# Altium PCB Copy of PCB_MainBoard.PcbDoc
Units mm, origin at the board's own origin, x right, y up, seen from the top; angles counter-clockwise.
Board outline 88.01 x 83.57 mm, 2 copper layers (Top Layer, Bottom Layer); 23 components, 28 nets, 100 pads, 8 vias.
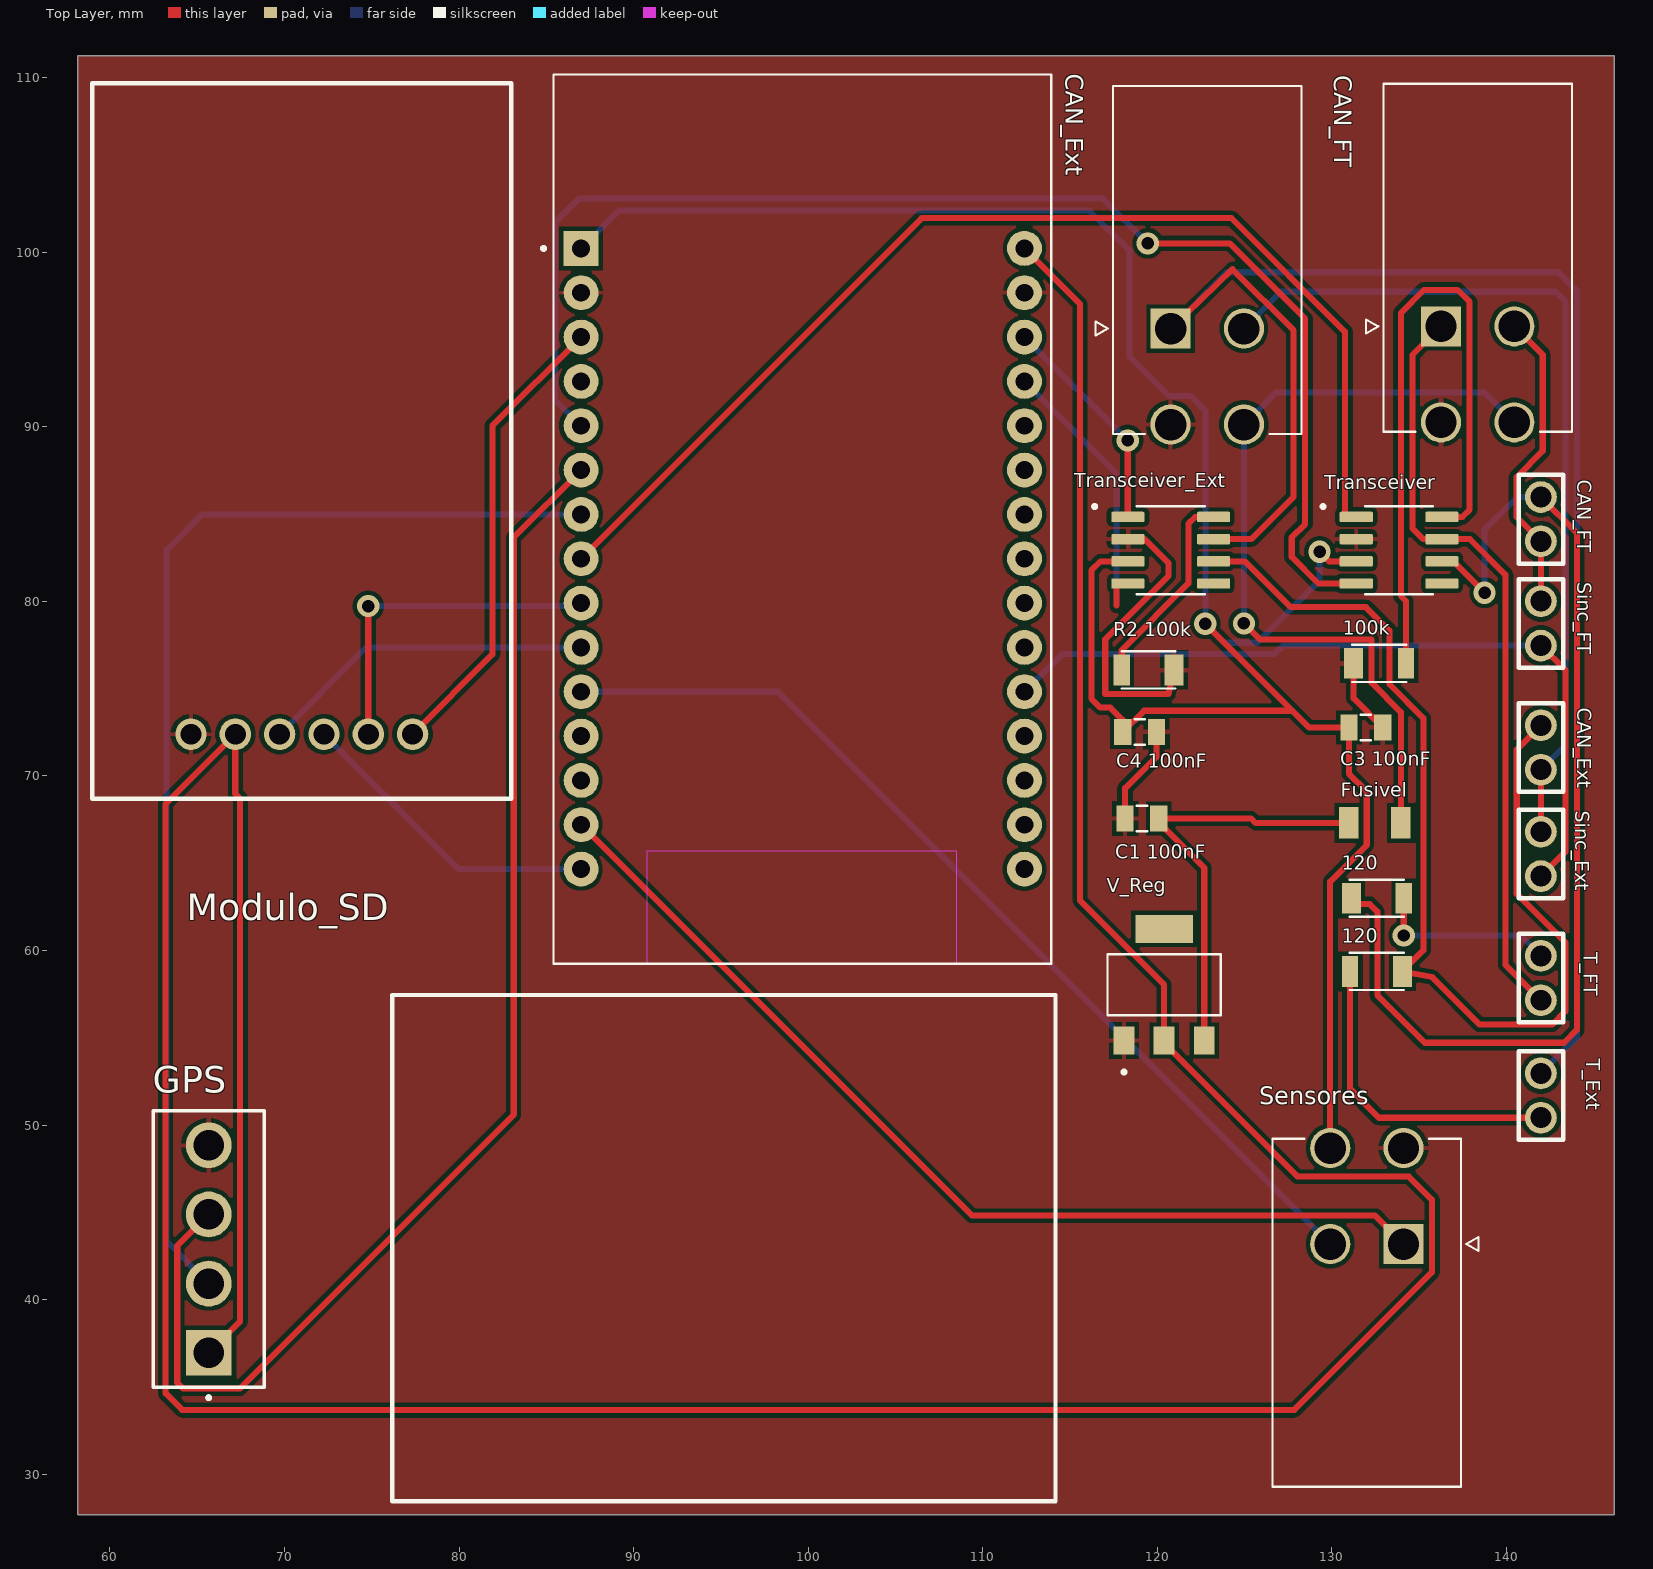
[diagram p0: Top Layer view]
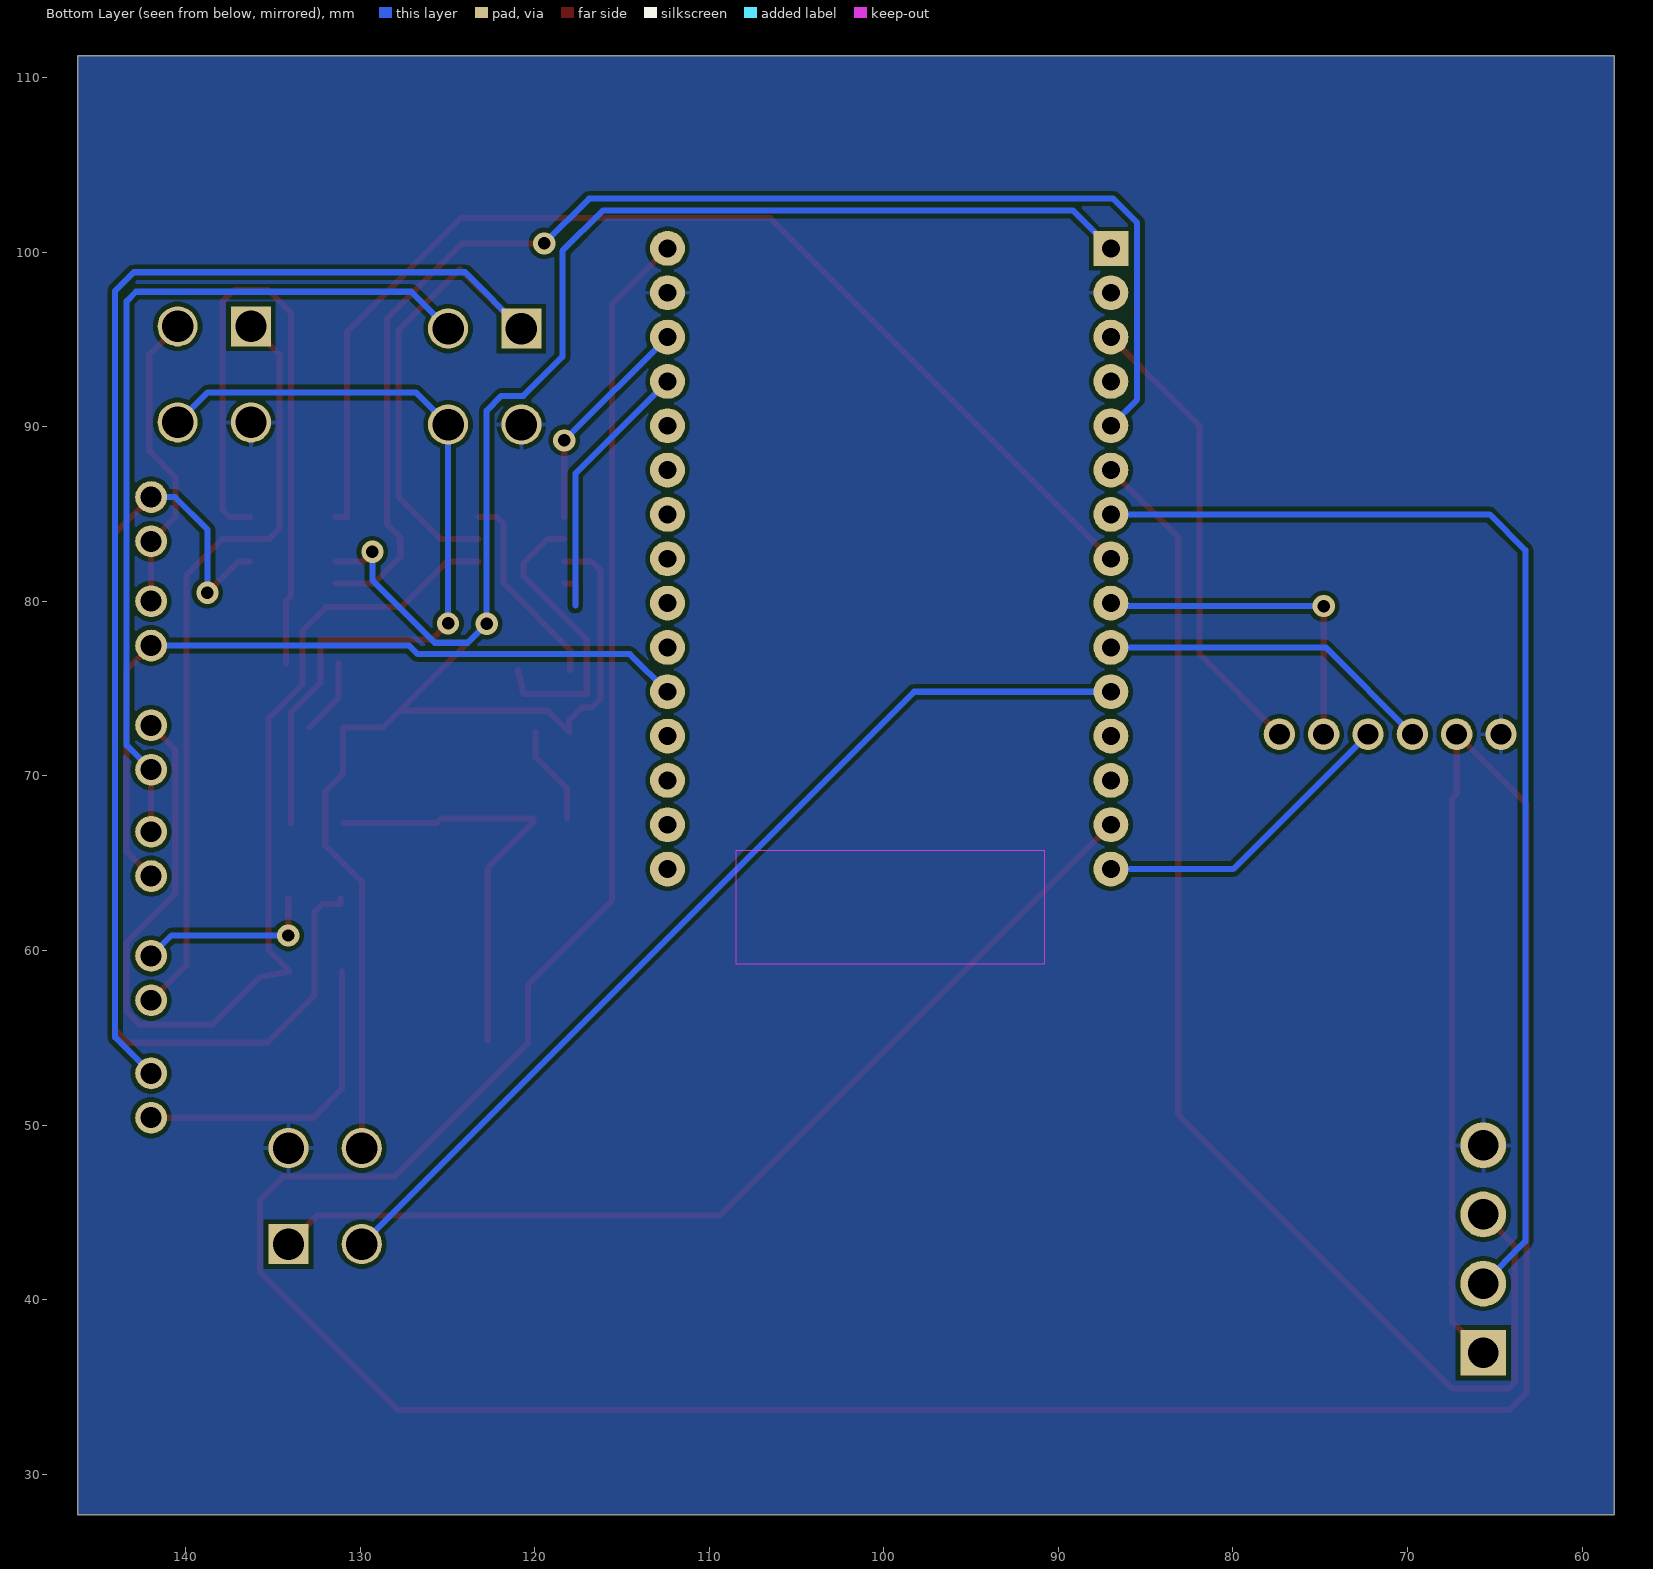
[diagram p1: Bottom Layer view, seen from below]

## Layer stack, top to bottom
Top Solder: solder mask 0.0102, Solder Resist, Dk 3.5
Top Layer: signal copper 0.0356
Dielectric 1: dielectric 0.32, FR-4, Dk 4.8
Bottom Layer: signal copper 0.0356
Bottom Solder: solder mask 0.0102, Solder Resist, Dk 3.5

## Board outline
58.166,27.686 146.177,27.686 146.177,111.252 58.166,111.252

## Design rules (kind name [scope] priority, off if disabled: settings)
Clearance [All] p1: gap=0.254 ignorepadtopadclearanceinfootprint=FALSE except(0: Arc-Hole Track-Hole SMDPad-Hole THPad-Hole Via-Hole Fill-Hole Poly-Hole Region-Hole Text-Hole; 0.3: Arc-Arc Arc-Track Arc-SMDPad Arc-THPad Arc-Via Track-Track Track-SMDPad Track-THPad Track-Via SMDPad-THPad SMDPad-Via THPad-THPad THPad-Via Via-Via)
PolygonConnect [All] p1: connectstyle=Relief reliefconductorwidth=0.254 reliefentries=4 polygonreliefangle="90 Angle" airgapwidth=0.254
RoutingVias [All] p1: holewidth=0.711 width=1.27 viastyle="Through Hole" minholewidth=0.711 minwidth=1.27 maxholewidth=0.711 maxwidth=1.27
SolderMaskExpansion [All] p1: expansion=0.102 istentingtop=FALSE
Width [All] p1: maxlimit=0.4 minlimit=0.254 preferedwidth=0.35 minimp=50.000000 maximp=50.000000 favimp=50.000000
30 further rules are at their usual default settings.

## Classes and differential pairs
component class Esquematico_MainBoard: 100k 120 "C1 100nF" "C3 100nF" "C4 100nF" CAN_Ext CAN_FT Fusivel GPS Modulo_SD "R2 100k" Sensores

## Components (designator, comment, footprint, x,y, rotation, side; value= is the part's Value field where it differs from the comment)
100k "CRG1206F620K" RESC3115X65N 132.715,76.454 r0 top
120 "CRG1206F620K" RESC3115X65N 132.588,58.801 r180 top (schematic designator "R2 120")
120 "CRG1206F620K" RESC3115X65N 132.588,62.992 r0 top
"C1 100nF" "C2012X5R1E225M085AC" *CAPC2012X100N 119.126,67.564 r180 top
"C3 100nF" "C2012X5R1E225M085AC" *CAPC2012X100N 131.953,72.771 r0 top
"C4 100nF" "C2012X5R1E225M085AC" *CAPC2012X100N 118.999,72.517 r0 top
CAN_Ext "2Pin" 2Pin 141.986,70.358 r90 top (schematic designator Seletor_2)
CAN_Ext "874270402" MOLEX_874270402 120.768,95.631 r180 top
CAN_FT "2Pin" 2Pin 141.986,83.439 r90 top (schematic designator Seletor_4)
CAN_FT "874270402" MOLEX_874270402 136.262,95.758 r180 top
Fusivel "F1206B3R00FWTR" *FUSM3216X140N 132.461,67.31 r180 top
GPS "FWJ-04-01-T-S" SAMTEC_FWJ-04-01-T-S 65.659,42.897 r90 top
Modulo_SD "Component_1" MICROSD_MODULE 58.983,68.69 r0 top
"R2 100k" "CRG1206F620K" RESC3115X65N 119.507,76.073 r180 top
Sensores "874270402" MOLEX_874270402 134.112,43.18 r0 top
Sinc_Ext "2Pin" 2Pin 141.986,64.262 r90 top (schematic designator Seletor_1)
Sinc_FT "2Pin" 2Pin 141.986,77.47 r90 top (schematic designator Seletor_3)
T_Ext "2Pin" 2Pin 141.986,50.419 r90 top (schematic designator Terminador_CAN_E)
T_FT "2Pin" 2Pin 141.986,59.69 r270 top (schematic designator 2Pin_CAN)
Transceiver "MCP2551-E/SN" SOIC127P600X175-8N 133.858,82.931 r0 top
Transceiver_Ext "MCP2551-E/SN" SOIC127P600X175-8N 120.777,82.931 r0 top (schematic designator Transceiver_CAN_Ext)
V_Reg "TS1117BCW50_RPG" VREG_TS1117BCW50_RPG 120.396,58.039 r90 top
? "ESP32-DEVKIT-V1" MODULE_ESP32_DEVKIT_V1 99.695,84.709 r0 top

## Footprints (in the part's own frame and the unit in brackets; to place one, negate y for a bottom-side part, rotate by r counter-clockwise, add the part's x,y. Pads: shape width x height; smd on the part's side, far side on the other; paste and mask are expansions set on the pad)
2Pin [mm]
  round 1.82 hole 1.2: 0(0,0) 1(2.54,0)
  silkscreen extent -1.27,-1.27 3.81,1.27, body extent -1.27,-1.19 3.79,1.27, height 8.54
*CAPC2012X100N [mm]
  rect 0.99x1.47 smd: 1(-0.965,0) 2(0.965,0)
  silkscreen extent -0.3,-0.73 0.3,0.73, body extent -1.05,-0.67 1.05,0.67, height 0.95
*FUSM3216X140N [mil]
  rect 44x71 smd: 1(-59,0) 2(59,0)
MICROSD_MODULE [mm]
  round 1.8 hole 1.2: 0(5.66,3.7) 1(8.2,3.7) 2(10.74,3.7) 3(13.28,3.7) 4(15.82,3.7) 5(18.36,3.7)
  silkscreen extent 0,0 24,41, body extent 0,-4.3 24,41.65, height 6.25
MODULE_ESP32_DEVKIT_V1 [mm]
  rect 2x2 / inner round 2 / far side rect 2x2 hole 1.02: 1(-12.7,15.515)
  round 2 hole 1.02: 2(-12.7,12.975) 3(-12.7,10.435) 4(-12.7,7.895) 5(-12.7,5.355) 6(-12.7,2.815) 7(-12.7,0.275) 8(-12.7,-2.265) 9(-12.7,-4.805) 10(-12.7,-7.345) 11(-12.7,-9.885) 12(-12.7,-12.425) 13(-12.7,-14.965) 14(-12.7,-17.505) 15(-12.7,-20.045) 16(12.7,-20.045) 17(12.7,-17.505) 18(12.7,-14.965) 19(12.7,-12.425) 20(12.7,-9.885) 21(12.7,-7.345) 22(12.7,-4.805) 23(12.7,-2.265) 24(12.7,0.275) 25(12.7,2.815) 26(12.7,5.355) 27(12.7,7.895) 28(12.7,10.435) 29(12.7,12.975) 30(12.7,15.515)
  Keep-Out Layer region: 8.78,-25.475 -8.91,-25.475 -8.91,-18.985 8.78,-18.985
  silkscreen extent -14.95,-25.47 14.23,25.47
MOLEX_874270402 [mm]
  rect 2.3x2.3 hole 1.8 mask+0.076: 1(0,0)
  round 2.3 hole 1.8 mask+0.076: 2(-4.2,0) 3(0,5.5) 4(-4.2,5.5)
  silkscreen extent -7.5,-13.9 4.3,6.04, body extent -7.62,-13.78 3.18,6.16, height 11.4
RESC3115X65N [mm]
  rect 1.09x1.77 smd: 1(-1.465,0)
  rect 0.94x1.77 smd: 2(1.54,0)
  silkscreen extent -1.55,-1.07 1.55,1.07, body extent -1.6,-0.8 1.6,0.8, height 0.55
SAMTEC_FWJ-04-01-T-S [mm]
  rect 2.625x2.625 hole 1.75: 01(-5.94,0)
  round 2.625 hole 1.75: 02(-1.98,0) 03(1.98,0) 04(5.94,0)
  silkscreen extent -8.62,-3.18 7.92,3.18
SOIC127P600X175-8N [mm]
  rrect25% 1.9x0.6 smd: 1(-2.455,1.905) 2(-2.455,0.635) 3(-2.455,-0.635) 4(-2.455,-1.905) 5(2.455,-1.905) 6(2.455,-0.635) 7(2.455,0.635) 8(2.455,1.905)
  silkscreen extent -4.45,-2.53 1.95,2.6, body extent -3,-2.45 3,2.45, height 1.75
VREG_TS1117BCW50_RPG [mm]
  rect 1.6x1.2 smd: 1(-3.2,2.3) 2(-3.2,0) 3(-3.2,-2.3)
  rect 1.6x3.3 smd: 4(3.2,0)
  silkscreen extent -5.1,-3.25 1.75,3.25, body extent -3.5,-3.25 3.5,3.25, height 1.9

## Part data
100k 120 120 "R2 100k": "Res Thick Film 1206 620K Ohm 1% 0.25W_1/4W_ Â±100ppm/C Pad SMD T/R", Package="1206 TE Connectivity", Availability=Unavailable, MF="TE Connectivity", MP=CRG1206F620K, Price="0.00 USD", SnapEDA_Link=https://www.snapeda.com/parts/CRG1206F620K/TE%20Connectivity%20/%20DEUTSCH/view-part/?ref=snap
"C1 100nF" "C3 100nF" "C4 100nF": "Cap Ceramic 2.2uF 25V X5R 20% SMD 0805 85Â°C Punched Paper T/R", Package="0805 TDK", Availability=Unavailable, MF=TDK, MP=C2012X5R1E225M085AC, Price=None, SnapEDA_Link=https://www.snapeda.com/parts/C2012X5R1E225M085AC/TDK/view-part/?ref=snap
CAN_Ext CAN_FT Sensores: "Conn Wire to Board HDR 4 POS 4.2mm Solder RA Side Entry Thru-Hole Mini-Fit Jrâ„¢ Tray", Package=None, Availability="In Stock", Check_prices=https://www.snapeda.com/parts/874270402/Molex/view-part/?ref=eda, MF=Molex, MP=874270402, Price=None, Purchase-URL=https://pricing.snapeda.com/search/part/874270402/?ref=eda, SnapEDA_Link=https://www.snapeda.com/parts/874270402/Molex/view-part/?ref=snap
Fusivel: "F1206B Series Fast Acting 63 V 3 A 1206 Surface Mount Thin-Film Fuse T&R", Package="1206 AVX", Availability=Unavailable, MF=AVX, MP=F1206B3R00FWTR, Price=None, SnapEDA_Link=https://www.snapeda.com/parts/F1206B3R00FWTR/AVX%20/%20Kyocera/view-part/?ref=snap
GPS: "Connector Header Through Hole 4 position 0.156 (3.96mm)", Package=None, Availability=Bad, Check_prices=https://www.snapeda.com/parts/FWJ-04-01-T-S/Samtec/view-part/3573755/?ref=eda, MF=Samtec, MP=FWJ-04-01-T-S, Price=None, Purchase-URL=https://pricing.snapeda.com/search/part/FWJ-04-01-T-S/?ref=eda, SnapEDA_Link=https://www.snapeda.com/parts/FWJ-04-01-T-S/Samtec/view-part/3573755/?ref=snap
Transceiver Transceiver_Ext: "1/1 Transceiver Half CANbus 8-SOIC", Package="SOIC-8 Microchip", Availability="In Stock", Check_prices=https://www.snapeda.com/parts/MCP2551-E/SN/Microchip/view-part/?ref=eda, MF=Microchip, MP=MCP2551-E/SN, Price=None, Purchase-URL=https://pricing.snapeda.com/search/part/MCP2551-E/SN/?ref=eda, SnapEDA_Link=https://www.snapeda.com/parts/MCP2551-E/SN/Microchip/view-part/?ref=snap
V_Reg: "1A 5V LOW DROPOUT VOLTAGE REGULATOR", Package="SOT-223 Taiwan Semiconductor", Availability="In Stock", Check_prices=https://www.snapeda.com/parts/TS1117BCW50%20RPG/Taiwan+Semiconductor/view-part/?ref=eda, MF="Taiwan Semiconductor", MP="TS1117BCW50 RPG", Price=None, Purchase-URL="https://pricing.snapeda.com/search/part/TS1117BCW50 RPG/?ref=eda", SnapEDA_Link=https://www.snapeda.com/parts/TS1117BCW50%20RPG/Taiwan+Semiconductor/view-part/?ref=snap
?: "Dual core, Wi-Fi: 2.4 GHz up to 150 Mbits/s,BLE (Bluetooth Low Energy) and legacy Bluetooth, 32 bits, Up to 240 MHz", Package=None, Availability="Not in stock", Check_prices=https://www.snapeda.com/parts/ESP32-DEVKIT-V1/Do+it/view-part/?ref=eda, MF="Do it", MP=ESP32-DEVKIT-V1, Price=None, SnapEDA_Link=https://www.snapeda.com/parts/ESP32-DEVKIT-V1/Do+it/view-part/?ref=snap

## Via types
v1: diameter 1.27, hole 0.711, Top Layer to Bottom Layer, 8 vias

## Nets (pads, with @x,y where several pads share a name; then routed paths per layer and width w, separated by ;. In a path a pad name is that pad's centre, name@x,y a point inside that pad or via, vN(x,y) a via of type N, cw(c..) or ccw(c..) an arc to the next point about the centre after c; other vN are vias at no path point)
GND: 100k.1 "C1 100nF.2" "C3 100nF.2" "C4 100nF.2" "R2 100k.1" ?.2 ?.29 CAN_Ext.3 CAN_FT.3 GPS.04 Modulo_SD.0 Sensores.3 Transceiver.2 Transceiver_Ext.2 V_Reg.1 | length 27
  Top Layer w0.35: 118.161,67.564 118.161,69.292 119.964,71.095 119.964,72.517 ; Transceiver_Ext.2 119.278,83.566 120.65,82.194 120.65,81.458 117.022,77.83 117.022,74.701 120.65,74.701 120.972,76.073 ; 100k.1 131.25,74.439 132.918,72.771
Net2Pin_CAN_0: 120.2@134.128,62.992 T_FT.0 | length 10.5
  Top Layer w0.35: v1(134.128,60.858) 120.2@134.128,62.992
  Bottom Layer w0.35: v1(134.128,60.858) 140.818,60.858 T_FT.0
Net2Pin_CAN_1: CAN_FT.1@136.262,95.758 T_FT.1 Transceiver.7 | length 43.9
  Top Layer w0.35: CAN_FT.1@136.262,95.758 134.62,94.116 134.62,84.201 135.255,83.566 Transceiver.7 137.922,83.566 139.951,81.537 139.951,59.185 T_FT.1
Net100k_2: 100k.2 Transceiver.8 | length 38.6
  Top Layer w0.35: 100k.2 134.255,80.019 133.96,80.315 133.96,96.52 135.28,97.841 137.211,97.841 137.897,97.155 137.897,85.255 137.477,84.836 Transceiver.8
Net120_1: 120.1@131.123,62.992 CAN_FT.1@141.986,85.979 Transceiver.6 | length 61.9
  Top Layer w0.35: 120.1@131.123,62.992 131.123,62.662 132.182,62.662 132.613,62.23 132.613,57.429 135.331,54.712 143.307,54.712 144.043,55.448 144.043,83.922 CAN_FT.1@141.986,85.979 ; Transceiver.6 136.957,82.296 v1(138.76,80.493)
  Bottom Layer w0.35: v1(138.76,80.493) 138.76,84.125 140.614,85.979 CAN_FT.1@141.986,85.979
Net_1: "C3 100nF.1" "C4 100nF.1" ?.1 Sensores.4 Transceiver.3 Transceiver_Ext.3 | length 128.5
  Top Layer w0.35: Transceiver_Ext.3 116.753,82.296 116.233,81.776 116.233,74.434 116.749,73.918 117.319,73.918 118.034,73.203 118.034,72.517 119.253,73.736 127.737,73.736 ; v1(122.758,78.715) 127.737,73.736 ; v1(129.305,82.848) 129.857,82.296 Transceiver.3 ; Sensores.4 129.912,63.948 132.004,66.04 132.004,69.114 130.988,70.129 130.988,72.771 130.023,72.771 128.702,72.771 127.737,73.736
  Bottom Layer w0.35: ?.1 89.158,102.387 116.103,102.387 118.415,100.076 118.415,94.005 120.65,91.77 121.92,91.77 122.758,90.932 v1(122.758,78.715) 123.843,77.63 125.73,77.63 129.305,81.205 v1(129.305,82.848)
Net_3: ?.3 Modulo_SD.5 | length 26.8
  Top Layer w0.35: Modulo_SD.5 81.915,76.962 81.915,90.064 ?.3
Net_5: ?.5 Transceiver.4 | length 76.9
  Top Layer w0.35: v1(119.456,100.508) 124.155,100.508 128.473,96.19 128.473,84.43 127.711,83.668 127.711,82.55 129.235,81.026 Transceiver.4
  Bottom Layer w0.35: ?.5 85.496,91.563 85.496,101.702 86.868,103.073 116.891,103.073 v1(119.456,100.508)
Net_6: ?.6 GPS.03 | length 74.8
  Top Layer w0.35: GPS.03 63.856,43.074 63.856,35.242 64.198,34.9 67.437,34.9 83.134,50.597 83.134,83.663 ?.6
Net_7: ?.7 GPS.02 | length 67.6
  Bottom Layer w0.35: GPS.02 63.246,43.33 63.246,82.931 65.299,84.984 ?.7
Net_8: ?.8 Transceiver.1 | length 65.8
  Top Layer w0.35: ?.8 106.507,101.956 124.257,101.956 130.759,95.453 130.759,84.836 Transceiver.1
Net_9: ?.9 Modulo_SD.4 | length 19.6
  Top Layer w0.35: Modulo_SD.4 v1(74.803,79.731)
  Bottom Layer w0.35: v1(74.803,79.731) 86.822,79.731 ?.9
Net_10: ?.10 Modulo_SD.2 | length 19.3
  Bottom Layer w0.35: Modulo_SD.2 74.697,77.364 ?.10
Net_11: ?.11 Sensores.2 | length 56
  Bottom Layer w0.35: ?.11 98.268,74.824 Sensores.2
Net_14: ?.14 Sensores.1 | length 57.1
  Top Layer w0.35: ?.14 109.393,44.806 132.486,44.806 Sensores.1
Net_15: ?.15 Modulo_SD.3 | length 17.9
  Bottom Layer w0.35: Modulo_SD.3 79.989,64.664 ?.15
Net_20: ?.20 Sinc_Ext.0 Sinc_FT.0 | length 45.1
  Top Layer w0.35: Sinc_Ext.0 143.383,65.659 143.383,76.073 Sinc_FT.0
  Bottom Layer w0.35: ?.20 114.551,76.98 126.713,76.98 127.203,77.47 Sinc_FT.0
Net_27: ?.27 Transceiver_Ext.4 | length 17
  Top Layer w0.35: 117.678,79.756 117.678,81.026 Transceiver_Ext.4
  Bottom Layer w0.35: ?.27 117.678,87.321 117.678,79.756
Net_28: ?.28 Transceiver_Ext.1 | length 12.8
  Top Layer w0.35: v1(118.313,89.226) 118.313,84.836 Transceiver_Ext.1
  Bottom Layer w0.35: ?.28 v1(118.313,89.226)
Net_30: ?.30 GPS.01 Modulo_SD.1 V_Reg.2 | length 224
  Top Layer w0.35: GPS.01 67.462,38.76 67.462,68.707 67.183,68.986 Modulo_SD.1 63.195,68.402 63.195,34.62 64.135,33.68 127.864,33.68 135.738,41.554 135.738,45.72 134.417,47.041 128.041,47.041 120.396,54.686 V_Reg.2 120.396,58.039 115.582,62.853 115.582,97.036 ?.30
"NetC1 100nF_1": "C1 100nF.1" Fusivel.2 V_Reg.3 | length 24.8
  Top Layer w0.35: V_Reg.3 122.696,64.73 120.091,67.335 120.091,67.564 125.374,67.564 125.628,67.31 Fusivel.2
NetCAN_Ext_1: CAN_Ext.1@120.768,95.631 T_Ext.1 Transceiver_Ext.7 | length 95.7
  Top Layer w0.35: CAN_Ext.1@120.768,95.631 124.308,99.035 127.813,95.529 127.813,85.996 125.383,83.566 Transceiver_Ext.7
  Bottom Layer w0.35: CAN_Ext.1@120.768,95.631 123.994,98.857 142.977,98.857 144.043,97.79 144.043,55.016 T_Ext.1
NetCAN_Ext_2: CAN_Ext.0 CAN_Ext.2 Sinc_Ext.1 | length 50.5
  Top Layer w0.35: Sinc_Ext.1 CAN_Ext.0
  Bottom Layer w0.35: CAN_Ext.2 127.076,97.739 142.85,97.739 143.383,97.206 143.383,71.755 CAN_Ext.0
NetCAN_Ext_4: CAN_Ext.4 CAN_FT.4 Fusivel.1 | length 47.3
  Top Layer w0.35: v1(124.968,78.74) 125.882,77.826 132.283,77.826 132.283,75.336 133.96,73.66 Fusivel.1
  Bottom Layer w0.35: v1(124.968,78.74) CAN_Ext.4 126.81,91.973 138.747,91.973 CAN_FT.4
NetCAN_FT_2: CAN_FT.0 CAN_FT.2 Sinc_FT.1 | length 17.6
  Top Layer w0.35: CAN_FT.2 142.088,94.132 142.088,88.621 140.589,87.122 140.589,84.836 CAN_FT.0 Sinc_FT.1
"NetR2 100k_2": "R2 100k.2" Transceiver_Ext.8 | length 11.6
  Top Layer w0.35: 117.967,76.073 117.967,77.202 121.793,81.028 121.793,84.455 122.174,84.836 Transceiver_Ext.8
"NetR2 120_1": 120.1@134.053,58.801 CAN_Ext.1@141.986,72.898 Transceiver_Ext.6 | length 61.5
  Top Layer w0.35: Transceiver_Ext.6 125.019,82.296 127.644,79.67 131.959,79.67 133.31,78.319 133.31,75.249 135.255,73.304 135.255,60.003 134.053,58.801 135.763,58.471 138.481,55.753 142.621,55.753 143.383,56.515 143.383,60.464 140.601,63.246 140.601,71.513 CAN_Ext.1@141.986,72.898
"NetR2 120_2": 120.2@131.048,58.801 T_Ext.0 | length 18.4
  Top Layer w0.35: 120.2@131.048,58.801 131.048,52.07 132.699,50.419 T_Ext.0
pads on no net: ?.4 ?.12 ?.13 ?.16 ?.17 ?.18 ?.19 ?.21 ?.22 ?.23 ?.24 ?.25 ?.26 Transceiver.5 Transceiver_Ext.5 V_Reg.4

## Polygon pours and split planes (outlines as drawn)
GND on Top Layer "NONET_L01_P-001" (solid, pour order 1): 58.166,111.252 58.166,27.686 146.177,27.686 146.177,111.252
GND on Bottom Layer "NONET_L01_P-001" (solid, pour order 2): 146.177,111.252 58.166,111.252 58.166,27.686 146.177,27.686

## Silkscreen, mask and mechanical layers (free items; w line width, h text height)
Top Overlay:
  lines w0.254: 76.173,28.448 114.173,28.448 114.173,57.448 76.173,57.448 76.173,28.448